# Altium PCB amplifier sp.PcbDoc
Units mil, origin at the board's own origin, x right, y up, seen from the top; angles counter-clockwise.
Board outline 708.66 x 1338.58 mil, 2 copper layers (Top Layer, Bottom Layer); 29 components, 26 nets, 93 pads, 22 vias.
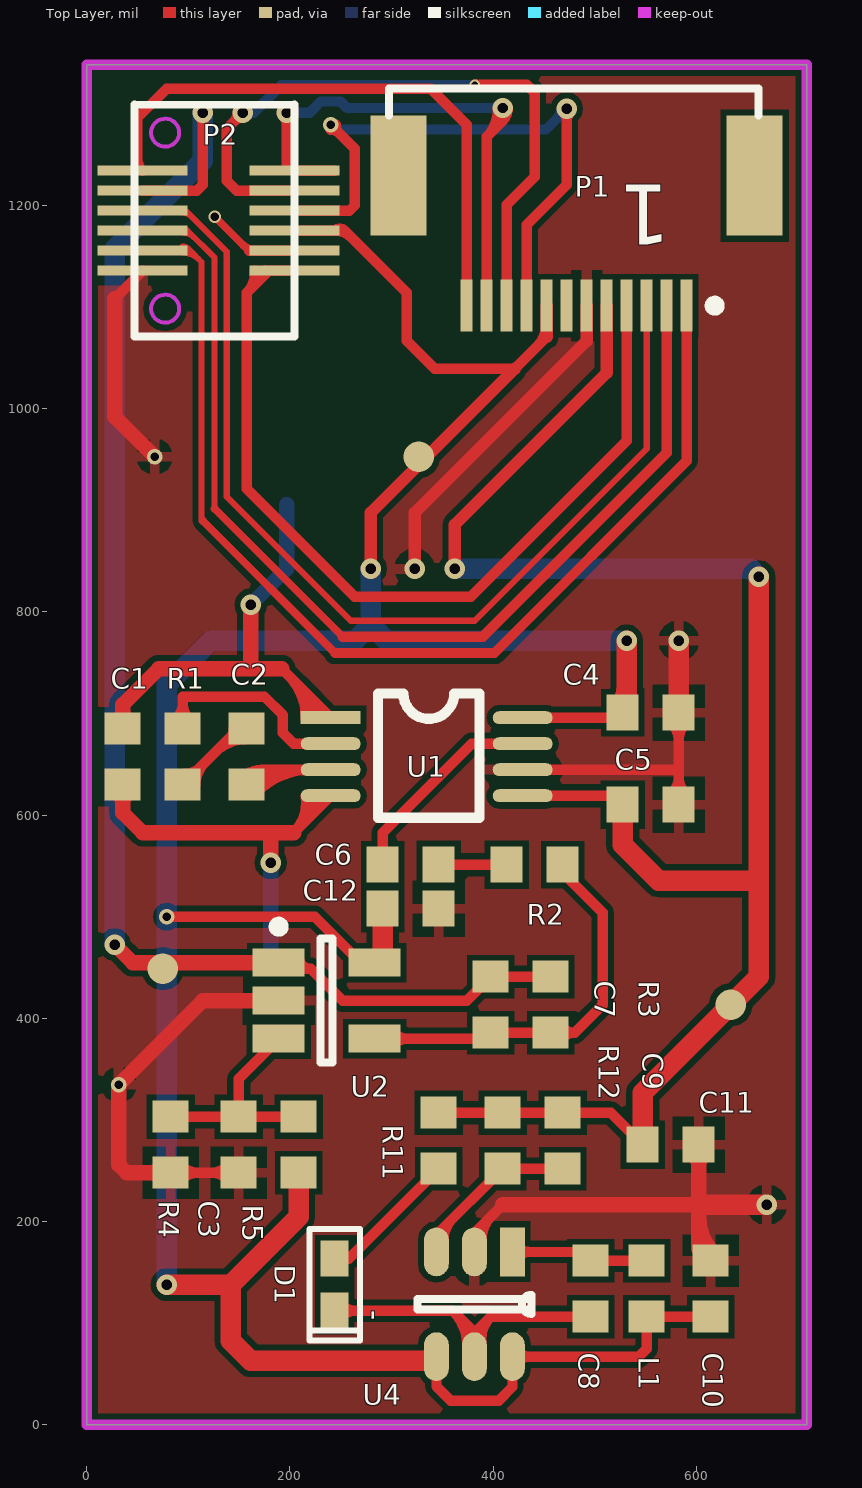
[diagram p0: Top Layer view]
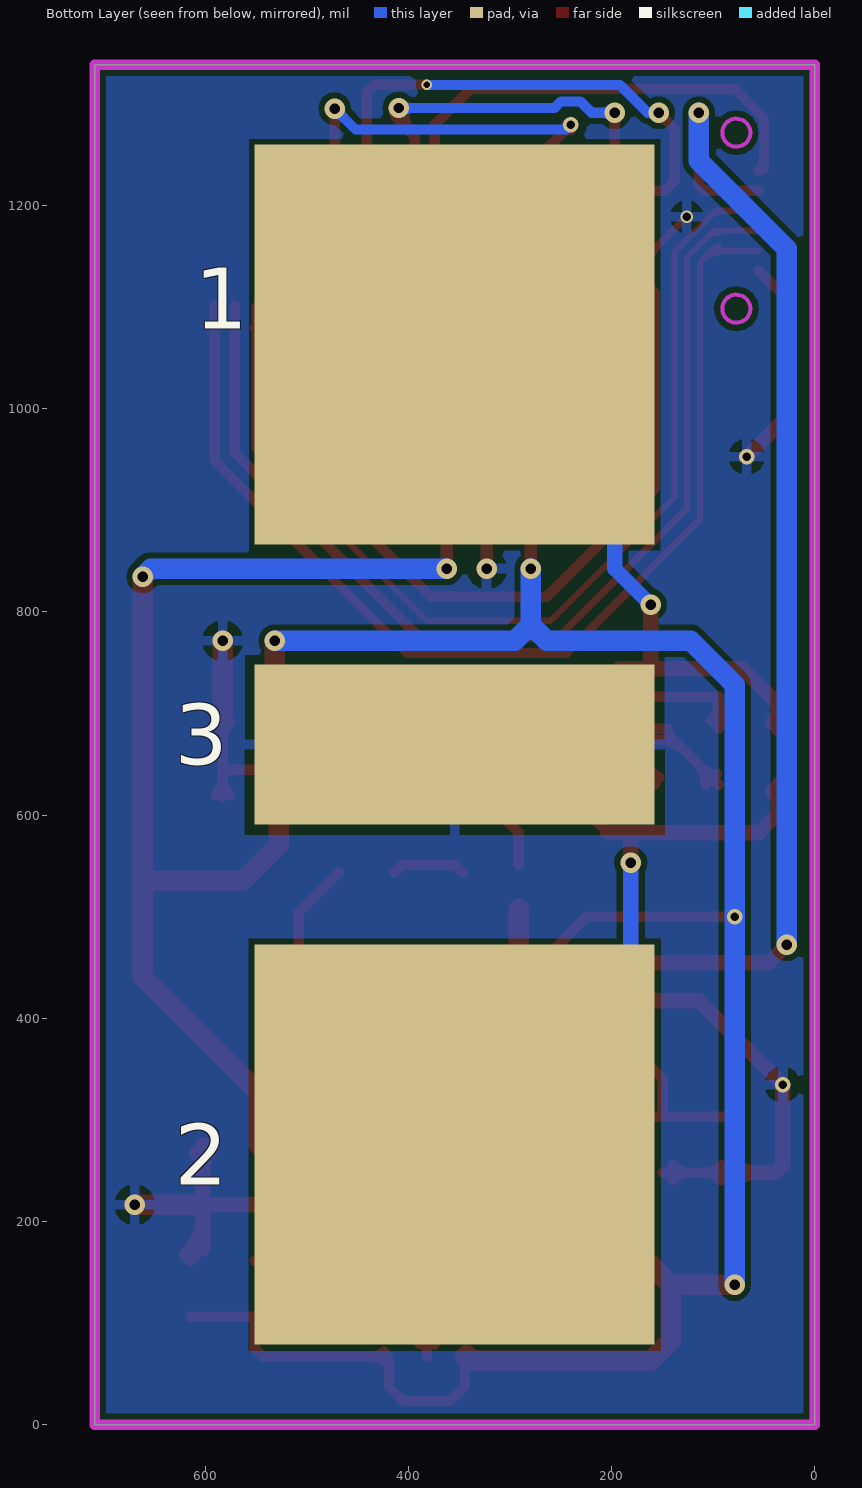
[diagram p1: Bottom Layer view, seen from below]

## Layer stack, top to bottom
Top Layer: signal copper 1.4
Dielectric: dielectric 12.6, FR-4, Dk 4.8
Bottom Layer: signal copper 1.4

## Board outline
0,0 0,1338.58 708.66,1338.58 708.66,0 0,0

## Design rules (kind name [scope] priority, off if disabled: settings)
Clearance [All] p1: gap=6
PolygonConnect [All] p1: connectstyle=Relief reliefconductorwidth=10 reliefentries=4 polygonreliefangle="90 Angle" airgapwidth=10
RoutingVias [All] p1: holewidth=28 width=50 viastyle="Through Hole" minholewidth=28 minwidth=50 maxholewidth=28 maxwidth=50
SilkToSolderMaskClearance SilkscreenOverComponentPads [IsPad] p1: minsilkscreentomaskgap=10 clearancetoexposedcopper=TRUE
SolderMaskExpansion [All] p1: expansion=4
Width [All] p1: maxlimit=20 minlimit=6 preferedwidth=10
27 further rules are at their usual default settings.

## Components (designator, comment, footprint, x,y, rotation, side; value= is the part's Value field where it differs from the comment)
1 "Electrode" elec-diff 354.33,1062.99 r270 bottom
2 "Electrode" elec-diff 354.33,275.59 r270 bottom
3 "Electrode" elec-ref 354.33,669.29 r270 bottom
C1 "" 1608[0603] 35.43,657.48 r90 top
C2 "" 1608[0603] 157.48,657.48 r270 top
C3 "" 1608[0603] 149.61,275.59 r90 top
C4 "Cap" 1608[0603] 555.12,700.79 r0 top
C5 "Cap" 1608[0603] 555.12,610.24 r180 top
C6 "" 1608[0603] 318.9,551.18 r180 top
C7 "" 1608[0603] 397.64,413.39 r270 top
C8 "Cap Semi" 1608[0603] 496.06,133.86 r270 top
C9 "Cap Semi" 1608[0603] 468.5,279.53 r90 top
C10 "Cap Semi" 1608[0603] 614.17,133.86 r270 top
C11 "Cap Semi" 1608[0603] 574.8,275.59 r0 top
C12 "" 1608[0603] 318.9,507.87 r180 top
D1 "Diode" D0402 244.09,137.8 r270 top
L1 "Res3" 1608[0603] 551.18,133.86 r90 top
P1 "" 12P_0.5mm()FPC 472.44,1165.35 r180 top
P2 "Header 2 * 6" btb0.5*12top 125.98,1185.04 r90 top
R1 "1k" 1608[0603] 94.49,657.48 r270 top
R2 "1K" 1608[0603] 440.94,551.18 r0 top
R3 "50K" 1608[0603] 456.69,413.39 r90 top
R4 "10K" 1608[0603] 82.68,275.59 r90 top
R5 "10K" 1608[0603] 208.66,275.59 r270 top
R11 "10" 1608[0603] 346.46,279.53 r90 top
R12 "330K" 1608[0603] 409.45,279.53 r270 top
U1 "AD8221" MSOP-8 334.65,657.48 r0 top
U2 "AD8603" SOT23-5AM 236.22,417.32 r0 top
U4 "LT3483" LT3843 377.95,118.11 r270 top

## Footprints (in the part's own frame and the unit in brackets; to place one, negate y for a bottom-side part, rotate by r counter-clockwise, add the part's x,y. Pads: shape width x height; smd on the part's side, far side on the other; paste and mask are expansions set on the pad)
12P_0.5mm()FPC [mm] "Connector; FH12 Series; 13 Position; 0.5mm Spaced Bottom Contact"
  rect 0.3x1.3 smd: 1(-3,1.625) 2(-2.5,1.625) 3(-2,1.625) 4(-1.5,1.625) 5(-1,1.625) 6(-0.5,1.625) 7(0,1.625) 8(0.5,1.625) 9(1,1.625) 10(1.5,1.625) 11(2,1.625) 12(2.5,1.625)
  rect 1.4x3 smd: 13(-4.7,-1.625) 14(4.2,-1.625)
  silkscreen extent -4.8,-3.81 4.44,1.75
1608[0603] [mm] "Chip Capacitor, Body 1.6x0.8mm, IPC High Density"
  rect 0.8x0.9 smd: 1(-0.7,0) 2(0.7,0)
  body extent -0.87,-0.48 0.87,0.48, height 1.3
btb0.5*12top [mm]
  rect 0.25x2.25 smd: 1(-1.25,1.8) 2(-0.75,1.8) 3(-0.25,1.8) 4(0.25,1.8) 5(0.75,1.8) 6(1.25,1.8) 7(1.25,-2) 8(0.75,-2) 9(0.25,-2) 10(-0.25,-2) 11(-0.75,-2) 12(-1.25,-2)
  Keep-Out Layer circle w0.1: c-2.2,1.24 r0.35
  Keep-Out Layer circle w0.1: c2.2,1.24 r0.35
  silkscreen extent -2.9,-2 2.9,2.01
D0402 [mm]
  rect 0.9x0.7 smd: 1(-0.65,0) 2(0.65,0)
  silkscreen extent -1.4,-0.63 1.4,0.64
elec-diff [mm] "12*5mm"
  rect 10x10 smd: 1(0,0)
elec-ref [mm] "12*5mm"
  rect 4x10 smd: 1(0,0)
LT3843 [mm]
  rect 1.22x0.62 smd: 1(-1.321,1.041)
  oval 1.22x0.62 smd: 2(-1.321,0.091) 3(-1.321,-0.859) 4(1.299,-0.859) 5(1.299,0.091) 6(1.299,1.041)
  silkscreen extent -0.25,-1.33 0.23,1.52
MSOP-8 [mm]
  rect 1.5x0.325 smd: 1(-2.4,0.975)
  oval 1.5x0.325 smd: 2(-2.4,0.325) 3(-2.4,-0.325) 4(-2.4,-0.975) 5(2.4,-0.975) 6(2.4,-0.325) 7(2.4,0.325) 8(2.4,0.975)
  silkscreen extent -1.22,-1.53 1.32,1.58
SOT23-5AM [mm] "SOT23, 5-Leads, Body 2.9x1.7mm, Pitch 0.95mm, Lead Span 2.8mm, IPC Low Density"
  rect 1.3x0.7 smd: 1(-1.2,0.95) 2(-1.2,0) 3(-1.2,-0.95) 4(1.2,-0.95) 5(1.2,0.95)
  silkscreen extent -1.32,-1.55 0.15,1.97, body extent -0.9,-1.55 0.9,1.55, height 1.45

## Part data
C1 C2 C3 C6 C7 C12: library part Cap, "Capacitor"
C4 C5: "Capacitor"
C8 C9 C10 C11: "Capacitor (Semiconductor SIM Model)"
D1: "Default Diode"
L1: "Resistor"
P1 P2: library part "Header 12", "Header, 12-Pin"
R1 R2 R3 R4 R5 R11 R12: library part Res2, "Resistor"
U1: library part INA128UA, "Precision, Low-Power Instrumentation Amplifiers"

## Free pads (board coordinates)
  round 30 smd: 2(74.8,448.82) 3(633.86,413.39) 4(326.77,952.76)

## Via types
v1: diameter 20, hole 10, Top Layer to Bottom Layer, 16 vias
v2: diameter 15, hole 8, Top Layer to Bottom Layer, 4 vias
v3: diameter 12, hole 8, Top Layer to Bottom Layer, 1 vias
v4: diameter 10, hole 6, Top Layer to Bottom Layer, 1 vias

## Nets (pads, with @x,y where several pads share a name; then routed paths per layer and width w, separated by ;. In a path a pad name is that pad's centre, name@x,y a point inside that pad or via, vN(x,y) a via of type N, cw(c..) or ccw(c..) an arc to the next point about the centre after c; other vN are vias at no path point)
+3.3V: C4.1 C10.2 C12.2 L1.1 P1.8 P2.10 pad.4 R5.2 U1.8 U2.5 U4.4 U4.6 | length 3227.4
  Top Layer w10: v2(78.74,500) 224.41,500 269.68,454.72 U2.5 ; P2.10 253.94,1175.2 ; P2.10@244.04,1175.25 cw(c248.96,1170.22) 253.94,1175.2 ; P2.10@244.09,1175.27 cw(c244.09,1151.7) 260.76,1168.37 ; U4.4 344.15,37.74 358.27,23.62 405.51,23.62 418.95,37.06 U4.6 543.34,66.96 551.18,74.8 L1.1 C10.2 ; U4.6@424.05,61.86 cw(c436.35,49.57) 436.35,66.96 cw(c436.35,84.35) U4.6@424.05,72.05 ; U1.8 522.64,695.87 C4.1 ; 443.55,1061.66 ccw(c423.53,1081.69) P1.8@451.85,1081.69 ; 452.76,1070.87 421.26,1039.37 342.52,1039.37 314.96,1066.93 314.96,1114.17 253.94,1175.2
  Top Layer w12: v1(279.53,842.52) 279.53,897.64 421.26,1039.37 ; 452.76,1070.87 P1.8
  Top Layer w20: v1(78.74,137.8) 141.73,137.8 ; R5.2 208.66,204.72 141.73,137.8 ; U2.5 291.34,462.6 C12.2 ; 329.25,62.99 ccw(c329.25,81.86) U4.4@342.59,68.52 ; U4.4 340.18,62.99 161.42,62.99 141.73,82.68 141.73,137.8 ; C4.1@523.49,706.82 ccw(c504.18,726.14) 531.5,726.14 ; C4.1 531.5,704.72 v1(531.5,771.65)
  Bottom Layer w20: v1(78.74,137.8) 78.74,728.35 122.05,771.65 263.78,771.65 279.53,787.4 ; v1(531.5,771.65) 295.28,771.65 279.53,787.4 ; 279.53,787.4 v1(279.53,842.52) 279.53,787.4
+3.7V: P1.4 P2.12 | length 895.4
  Top Layer w10: P2.12@165.43,1135.83 cw(c138.06,1133.59) 157.48,1114.17 ; 172.76,1129.45 ccw(c166.3,1135.9) P2.12@175.4,1136.65 ; P2.12 179.13,1135.83 157.48,1114.17 ; P1.4 531.5,968.5 377.95,814.96 263.78,814.96 157.48,921.26 157.48,1114.17
+VS: P1.7
-VS: C5.2 C9.2 C11.1 P1.5 pad.3 R11.2 R12.1 U1.5 | length 1728.8
  Top Layer w10: R11.2 R12.1 C9.2 515.75,307.09 C11.1 ; U1.5 C5.2@526.58,619.09
  Top Layer w12: v1(362.21,842.52) 362.21,885.83 511.81,1035.43 P1.5
  Top Layer w20: C5.2 527.56,570.87 562.99,535.43 661.42,535.43 ; C11.1 547.24,326.77 661.42,440.94 661.42,535.43 ; v1(661.42,834.65) 661.42,535.43
  Bottom Layer w20: v1(362.21,842.52) 653.54,842.52 v1(661.42,834.65)
GND: 3.1 C3.1 C4.2 C5.1 C10.1 C11.2 C12.1 P1.6 P2.1 P2.11 R4.1 U1.6 U2.2 U4.2 | length 2099.8
  Top Layer w8: v3(125.98,1188.98) 159.45,1155.51 P2.11@165.35,1155.51 ; 153.7,1161.26 ccw(c165.35,1172.91) P2.11@165.35,1156.43
  Top Layer w10: 27.56,1108.27 P2.1 ; R4.1 C3.1 ; R4.1@92.25,240.43 cw(c110.59,222.08) 110.59,248.03 cw(c110.59,273.98) R4.1@92.25,255.63 ; C3.1@140.04,240.43 ccw(c121.69,222.08) 121.69,248.03 ccw(c121.69,273.98) C3.1@140.04,255.63 ; 159.64,1155.51 P2.11 ; U4.2 381.55,188.64 409.45,216.54 ; U4.2@388.75,181.92 cw(c422.36,181.92) 398.6,205.69 ; U1.6 577.76,644.68 ; C5.1@575.08,619.8 ccw(c556.73,638.15) 582.68,638.15 ccw(c608.62,638.15) C5.1@590.28,619.8 ; C4.2@575.08,691.22 cw(c556.73,672.87) 582.68,672.87 cw(c608.63,672.87) C4.2@590.28,691.22 ; C5.1@582.68,618.11 C4.2 ; C10.1@602.36,173.23 C10.1
  Top Layer w12: v1(322.83,842.52) 322.83,897.64 492.13,1066.93 P1.6
  Top Layer w15: 27.56,1108.27 27.56,992.13 v2(66.93,952.76) ; R4.1@74.88,242.2 ccw(c60.8,228.12) 60.8,248.03 ccw(c60.8,267.94) R4.1@74.88,253.86 ; R4.1 39.37,248.03 31.5,255.91 v2(31.5,334.65) 114.17,417.32 U2.2 ; U2.2@172.72,412.88 ccw(c162.01,402.16) 162.01,417.32 ccw(c162.01,432.48) U2.2@172.72,421.76 ; 409.45,216.54 602.36,216.54 ; C11.2@596.53,267.79 cw(c582.45,253.71) 602.36,253.71 cw(c622.27,253.71) C11.2@608.19,267.79 ; C10.1@602.36,173.23 602.36,216.54 ; 602.36,205.09 ccw(c655.88,205.09) C10.1@618.04,167.25 ; C11.2 602.36,216.54
  Top Layer w20: C4.2 v1(582.68,771.65) ; 602.36,216.54 v1(669.29,216.54)
Net1_1: 1.1 C1.2 U1.1 | length 553
  Top Layer w10: 191.93,744.09 U1.1 ; 198.29,737.74 cw(c156.41,695.87) U1.1@215.63,695.87 ; 215.36,720.67 cw(c190.56,695.87) U1.1@225.63,695.87 ; 232.43,703.6 cw(c224.7,695.87) U1.1@235.63,695.87
  Top Layer w15: C1.2@29.6,690.87 ccw(c15.52,704.95) 35.43,704.95 ccw(c55.35,704.95) C1.2@41.27,690.87 ; C1.2 35.43,708.66 70.87,744.09 161.42,744.09 ; v1(161.42,807.09) 161.42,744.09 ; 191.93,744.09 161.42,744.09
  Bottom Layer w15: v1(161.42,807.09) 196.85,842.52 1.1@196.85,905.51
Net2_1: 2.1 C1.1 U1.4 | length 486.1
  Top Layer w10: U1.4@215.64,618.89 cw(c173.86,612.56) 203.74,582.68 U1.4 ; 217.74,596.68 ccw(c198.17,616.24) U1.4@225.53,620.38
  Top Layer w15: C1.1@29.6,624.09 cw(c15.52,610.01) 35.43,610.01 cw(c55.35,610.01) C1.1@41.27,624.09 ; C1.1 35.43,602.36 55.12,582.68 203.74,582.68 ; v1(181.1,553.15) 181.1,582.68
  Bottom Layer w15: 2.1@181.1,448.82 v1(181.1,553.15)
NetC2_1: C2.1 R1.2 | length 167.3
  Top Layer w10: R1.2 149.61,685.04 C2.1 ; R1.2@96.46,640.67 ccw(c96.46,661.86) 111.44,646.88 ; R1.2@107.2,629.92 cw(c137.91,629.92) 116.2,651.63 ; 127.08,662.52 cw(c155.51,634.09) C2.1@155.51,674.29 ; C2.1@141.34,676.77 ccw(c133.07,685.04) C2.1@144.76,685.04
NetC2_2: C2.2 U1.3 | length 211.8
  Top Layer w10: C2.2@152.91,636.46 cw(c172.75,616.62) C2.2@172.75,644.68 ; C2.2 172.24,644.68 U1.3 ; C2.2@159.98,629.39 cw(c196.9,592.47) 196.9,644.68 ; C2.2@167.05,622.32 cw(c221.04,568.33) U1.3@221.04,644.68
NetC6_1: C6.1 R2.1 | length 73.5
  Top Layer w10: C6.1@346.46,543.31 354.33,551.18 405.51,551.18 R2.1@413.39,543.31
NetC6_2: C6.2 U1.7 | length 205.6
  Top Layer w10: C6.2 291.34,582.68 378.94,670.27 U1.7
NetC7_2: C7.2 R2.2 R3.1 U2.4 | length 448.1
  Top Layer w10: U2.4 391.73,379.92 C7.2 R3.1 480.32,385.83 ; U2.4@301.48,373.71 cw(c316.47,358.72) 316.47,379.92 cw(c316.47,401.12) U2.4@301.48,386.13 ; R3.1@467.22,379.33 cw(c480.31,369.39) 480.31,385.83 ; R3.1@467.22,392.33 ccw(c480.31,402.26) 480.31,385.83 ; R2.2@468.5,543.31 507.87,503.94 507.87,413.39 480.32,385.83
NetC8_1: C8.1 L1.2 U4.1 | length 163.2
  Top Layer w10: U4.1 487.37,170.11 C8.1 L1.2 ; U4.1@424.05,165.01 cw(c436.35,152.72) 436.35,170.11 cw(c436.35,187.5) U4.1@424.05,175.2
NetC8_2: C8.2 D1.2 U4.5 | length 423
  Top Layer w10: D1.2 360.24,112.2 381.55,90.89 U4.5@381.55,90.21 ; D1.2@250.3,105.99 cw(c265.29,91.01) 265.29,112.2 cw(c265.29,133.4) D1.2@250.3,118.41 ; 360.68,111.76 cw(c327.69,78.77) U4.5@374.35,78.77 ; 377.75,94.69 cw(c361.83,78.77) U4.5@384.35,78.77 ; U4.5@378.78,78.39 cw(c394.84,80.58) 383.38,92.04 ; U4.5 U4.5@381.55,90.21 ; U4.5@388.69,79.74 cw(c419.94,84) 397.64,106.3 ; C8.2 397.64,106.3 ; U4.5@381.55,90.21 397.64,106.3
NetC9_1: C9.1 R12.2 U4.3 | length 190.6
  Top Layer w10: U4.3 344.15,186.67 R12.2 C9.1 ; U4.3@351.35,181.92 cw(c380.21,181.92) 359.8,202.32
NetD1_1: D1.1 R11.1 | length 139.1
  Top Layer w10: D1.1 257.87,163.38 R11.1
NetR1_1: R1.1 U1.2 | length 247.4
  Top Layer w10: R1.1@86.89,692.64 ccw(c68.54,710.99) 94.49,710.99 ccw(c120.44,710.99) R1.1@102.09,692.64 ; R1.1 94.49,716.54 175.01,716.54 192.91,698.63 192.91,681.1 203.74,670.27 U1.2
REF: C3.2 R4.2 R5.1 U2.3 | length 219.1
  Top Layer w10: R4.2 C3.2 ; U2.3 149.61,340.55 C3.2 ; R5.1 C3.2
V1: P1.9 P2.9 | length 660.2
  Top Layer w10: P2.9 258.68,1194.88 263.78,1199.98 263.78,1255.91 v2(240.16,1279.53) ; v2@240.16,1274.53 cw(c240.16,1262.46) 248.69,1270.99 cw(c257.23,1279.53) v2@245.16,1279.53 ; P1.9 433.07,1181.1 472.44,1220.47 v1(472.44,1295.28) ; v1@468.91,1291.74 cw(c460.37,1283.21) 472.44,1283.21 cw(c484.51,1283.21) v1@475.98,1291.74
  Bottom Layer w10: v2(240.16,1279.53) 244.79,1274.9 452.06,1274.9 v1(472.44,1295.28) ; v1@467.44,1295.28 cw(c455.37,1295.28) 463.91,1286.74 cw(c472.44,1278.21) v1@472.44,1290.28
V2: P1.10 P2.8 | length 702.4
  Top Layer w10: v1@148.54,1291.34 cw(c136.47,1291.34) 145.01,1282.8 cw(c153.54,1274.27) v1@153.54,1286.34 ; v1(153.54,1291.34) 137.8,1275.59 137.8,1224.41 147.64,1214.57 P2.8 ; v4(381.89,1318.9) 433.07,1318.9 440.95,1311.02 440.95,1228.35 413.39,1200.79 P1.10
  Bottom Layer w10: v1(153.54,1291.34) 164.32,1291.34 ; v1@157.36,1288.11 cw(c164.32,1282.22) 164.32,1291.34 ; v1@157.36,1294.57 ccw(c164.32,1300.46) 164.32,1291.34 ; v4(381.89,1318.9) 381.52,1318.53 191.51,1318.53 164.32,1291.34
V3: P1.11 P2.7 | length 656.9
  Top Layer w10: v1@193.31,1287.8 cw(c184.78,1279.27) 196.85,1279.27 cw(c208.92,1279.27) v1@200.39,1287.8 ; P2.7@196.85,1236.22 v1(196.85,1291.34) ; 196.85,1253.07 ccw(c223.54,1253.07) P2.7@204.67,1234.2 ; P2.7 P2.7@244.02,1234.25 ; P1.11 393.7,1267.72 ; v1@404.46,1295.65 cw(c367.63,1293.79) 393.7,1267.72 ; v1@405.91,1292.36 cw(c397.38,1283.83) 409.45,1283.83 cw(c421.52,1283.83) v1@412.99,1292.36 ; v1(409.45,1295.9) 409.45,1283.46 393.7,1267.72 ; 409.63,1283.64 ccw(c397.95,1295.32) v1@414.44,1296.15
  Bottom Layer w10: v1(196.85,1291.34) 219.44,1291.34 230.63,1302.53 249.68,1302.53 256.31,1295.9 v1(409.45,1295.9) ; v1@200.39,1287.8 cw(c208.92,1279.27) 208.92,1291.34 cw(c208.92,1303.41) v1@200.39,1294.87 ; v1@405.91,1292.36 ccw(c397.38,1283.83) 397.38,1295.9 ccw(c397.38,1307.97) v1@405.91,1299.43
V4: P1.12 P2.6 | length 592.6
  Top Layer w10: P2.6@49.89,1236.22 49.89,1286.11 78.74,1314.96 338.58,1314.96 374.02,1279.53 P1.12 ; 49.89,1246.67 ccw(c67.54,1246.67) P2.6@55.06,1234.2
V5: C7.1 P2.5 pad.2 R3.2 U2.1 | length 1506.7
  Top Layer w10: P2.5 108.27,1214.57 114.17,1220.47 v1(114.17,1291.34) ; v1@110.64,1287.8 cw(c102.1,1279.27) 114.17,1279.27 cw(c126.24,1279.27) v1@117.71,1287.8 ; U2.1 194.88,448.82 220.47,448.82 ; U2.1@209.2,457.23 ccw(c220.47,460.58) 220.47,448.82 ; R3.2 C7.1 374.02,417.32 251.97,417.32 220.47,448.82
  Top Layer w15: v1(27.56,472.44) 45.28,454.72 U2.1 ; U2.1@172.72,450.28 ccw(c162.01,439.56) 162.01,454.72 ccw(c162.01,469.88) U2.1@172.72,459.16
  Bottom Layer w20: v1(27.56,472.44) 27.56,1157.31 114.17,1243.92 v1(114.17,1291.34)
V6: P1.3 P2.4 | length 1035.4
  Top Layer w6: P2.4 97.37,1194.88 137.8,1154.46 137.8,913.39 259.84,791.34 381.89,791.34 551.18,960.63 P1.3 ; P2.4@94.49,1192.96 cw(c94.49,1181.36) 102.69,1189.56 ; P1.3@549.13,1079.64 cw(c544.17,1074.68) 551.18,1074.68 cw(c558.2,1074.68) P1.3@553.24,1079.64
V7: P1.2 P2.3 | length 1058.1
  Top Layer w6: P2.3 99.17,1175.2 125.8,1148.57 125.8,901.76 125.98,901.57 ; P2.3@94.49,1173.27 cw(c94.49,1157.33) 105.76,1168.6
  Top Layer w8: 125.98,901.57 251.97,775.59
  Top Layer w10: 251.97,775.59 389.76,775.59 570.87,956.69 P1.2
V8: P1.1 P2.2 | length 1102.5
  Top Layer w6: P2.2 101.89,1155.51 112.98,1144.41 112.98,890.14 ; P2.2@94.49,1153.59 cw(c94.49,1131.09) 110.4,1147 ; P2.2@94.49,1159.59 cw(c94.49,1151.58) 100.15,1157.24 ; 113.8,890.14 114.17,889.76
  Top Layer w8: 114.17,889.76 244.35,759.59
  Top Layer w10: 244.35,759.59 401.32,759.59 590.55,948.82 P1.1
pads on no net: P1.13 P1.14

## Polygon pours and split planes (outlines as drawn)
GND on Bottom Layer "GND" (solid, remove dead copper, pour order 2): 0,1338.58 708.66,1338.58 708.66,0 0,0 0,1338.58
GND on Top Layer "GND" (solid, remove dead copper, pour order 5): -122.05,1444.88 -122.05,-169.29 -110.24,-181.1 901.57,-181.1 901.57,1401.57 822.83,1480.32

## Keep-outs
Keep-Out Layer:
  the board outline again, w10

## Silkscreen, mask and mechanical layers (free items; w line width, h text height)
Mechanical 1:
  the board outline again, w10

## Text inside footprints (layer, text, board x,y; h text height)
D1: Top Overlay "-" at 274.09,112.8 h20 r270
P1: Top Overlay "1" at 574.8,1220.47 h59.06 r180